# Altium PCB 2um_Homodyne.PcbDoc
Units mil, origin at the board's own origin, x right, y up, seen from the top; angles counter-clockwise.
Board outline 2534 x 1642.5 mil, 4 copper layers (Top Layer, GND, +Vs, Bottom Layer), stack 30.634 mil thick; 46 components, 33 nets, 161 pads, 118 vias.
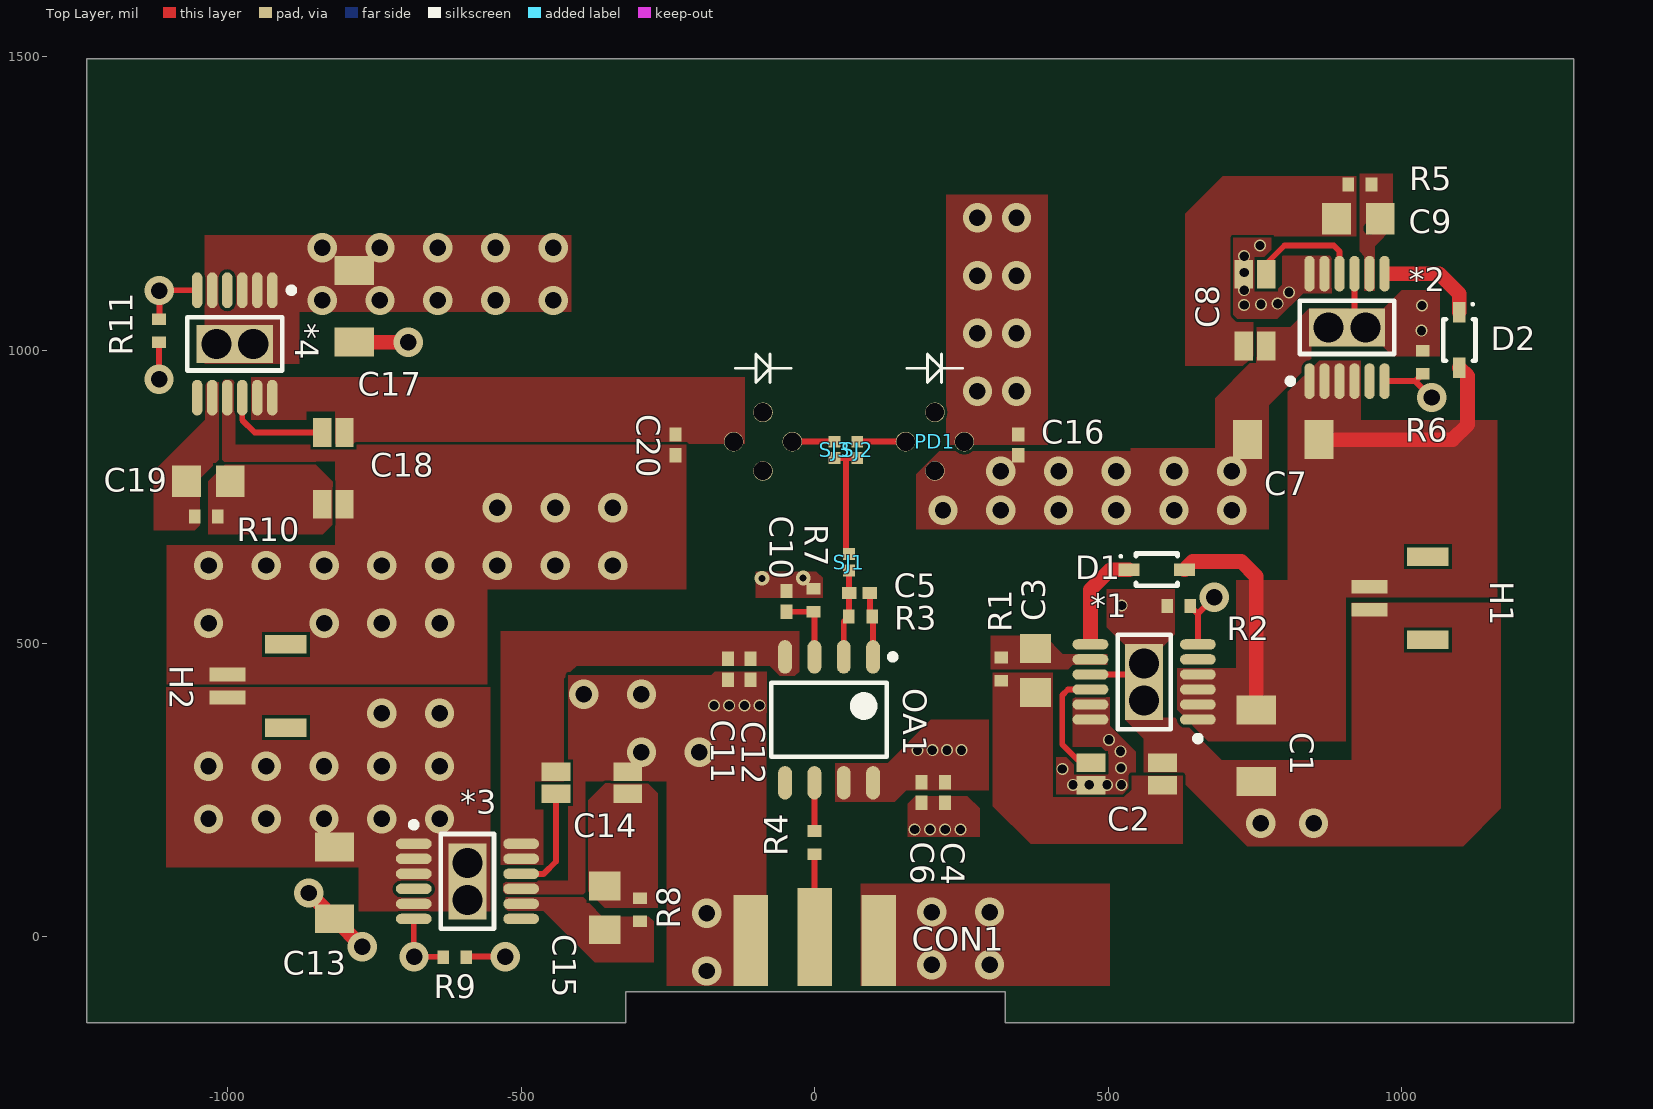
[diagram p0: Top Layer view]
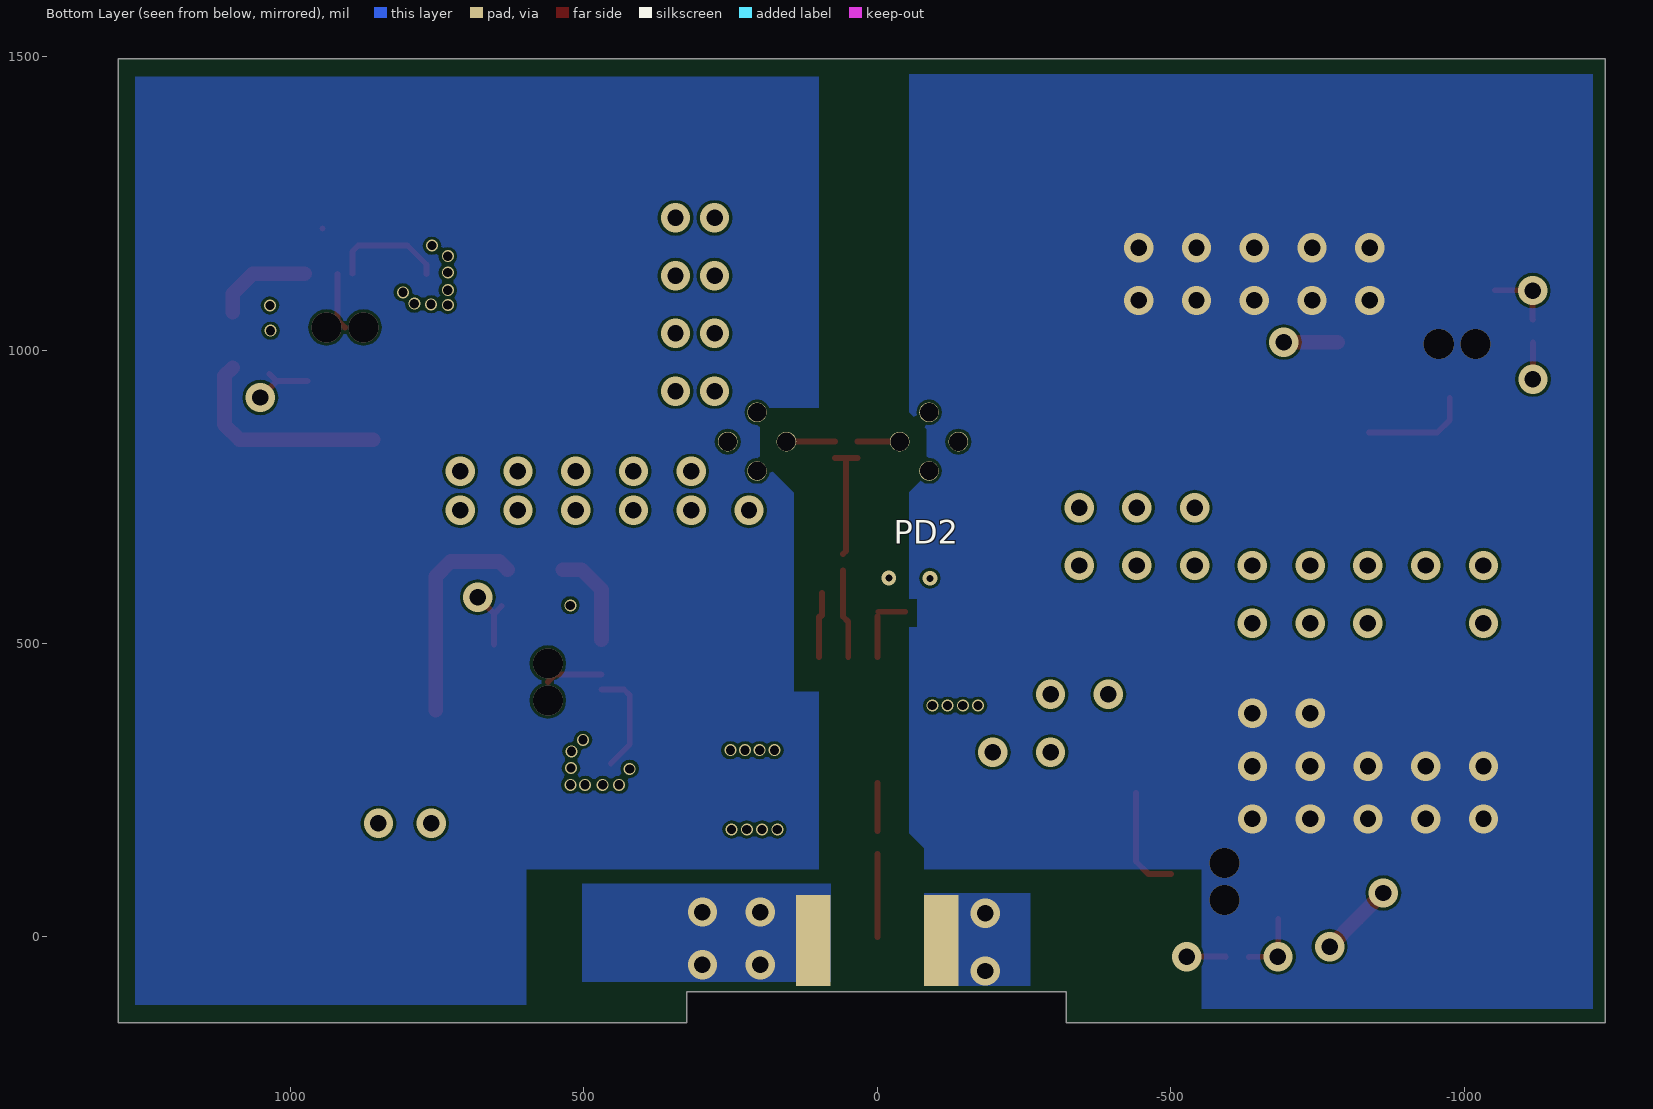
[diagram p1: Bottom Layer view, seen from below]
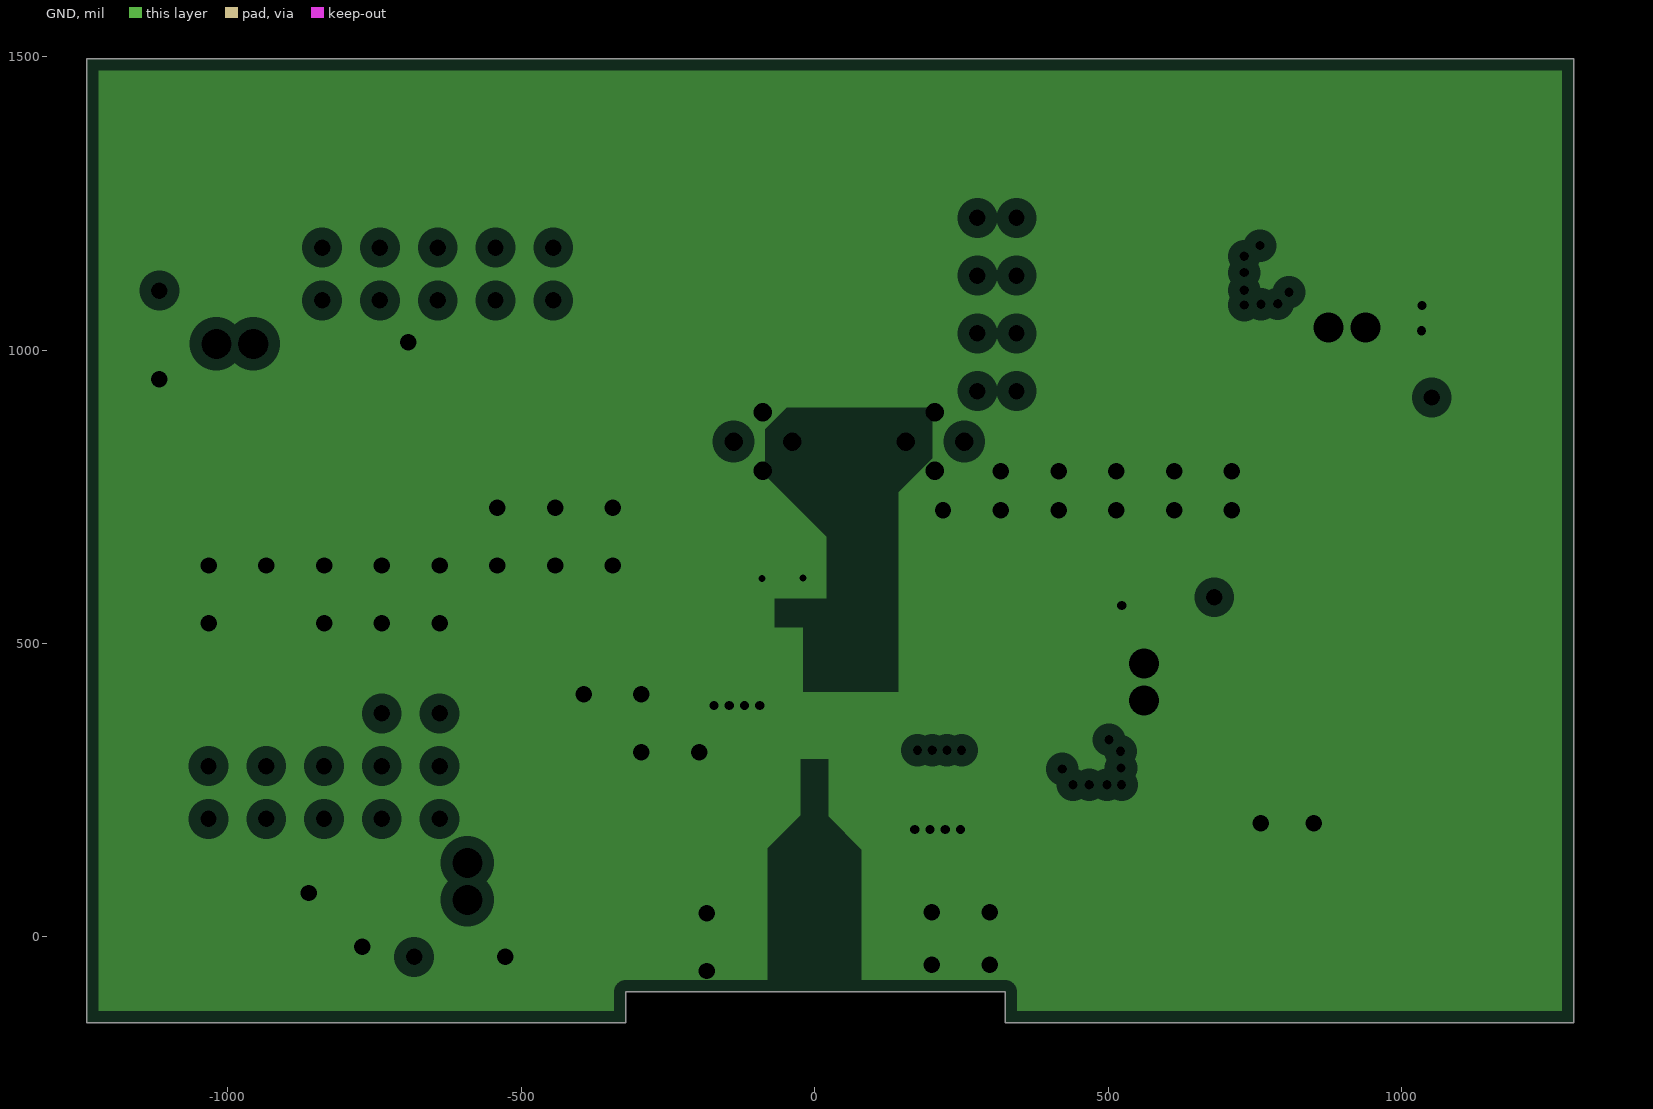
[diagram p2: GND, clearances drawn from the general rule]
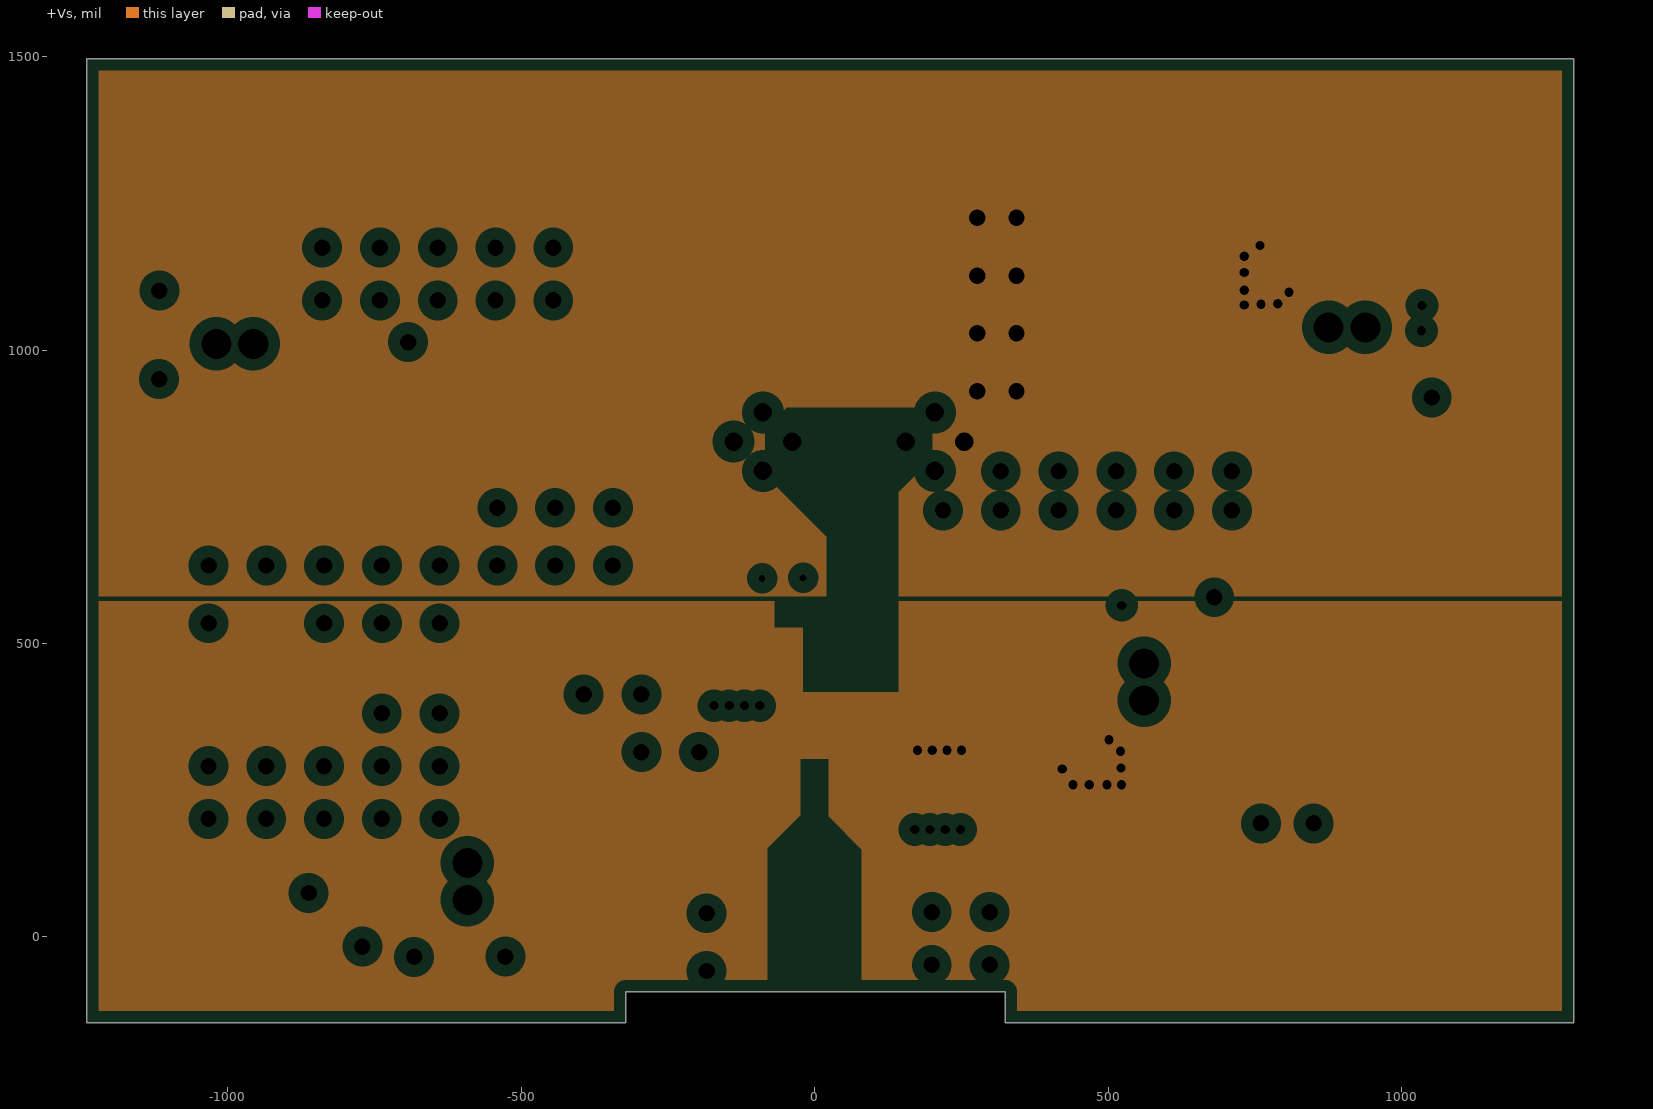
[diagram p3: +Vs, clearances drawn from the general rule]

## Layer stack, top to bottom
Top Solder: solder mask 0.4, Solder Resist, Dk 3.5
Top Layer: signal copper 1.4
Dielectric 1: core 10, FR-4, Dk 4.2
GND: plane copper 1.417, net GND
Dielectric 3: prepreg 5, Dk 4.2
+Vs: plane copper 1.417, net +Vs
Dielectric 2: core 10, Dk 4.2
Bottom Layer: signal copper 1.4
Bottom Solder: solder mask 0.4, Solder Resist, Dk 3.5

## Board outline
-1240.5,-146 -1240.5,1496.5 1293.5,1496.5 1293.5,-146 325,-146 325,-93 -321.5,-93 -321.5,-146

## Design rules (kind name [scope] priority, off if disabled: settings)
Clearance [All] p1: gap=5 ignorepadtopadclearanceinfootprint=FALSE except(0: Arc-Hole Track-Hole SMDPad-Hole THPad-Hole Via-Hole Fill-Hole Poly-Hole Region-Hole Text-Hole; 10: Arc-Text Track-Text SMDPad-Text THPad-Text Via-Text Fill-Text Poly-Text Region-Text Text-Text)
HoleSize [All] p1: absolutevalues=TRUE maxlimit=100 minlimit=0.79 maxpercent=80.000 minpercent=20.000
PlaneClearance [All] p1: clearance=20
PlaneConnect [All] p1: planeconnectstyle=Direct reliefexpansion=20 reliefentries=4 reliefconductorwidth=10 reliefairgap=10
PolygonConnect [All] p1: connectstyle=Direct reliefconductorwidth=10 reliefentries=4 polygonreliefangle="90 Angle" airgapwidth=10
RoutingVias [All] p1: holewidth=28 width=50 viastyle="Through Hole" minholewidth=7.87 minwidth=11.81 maxholewidth=236.22 maxwidth=50
SolderMaskExpansion [All] p1: expansion=4
Width [All] p1: maxlimit=300 minlimit=5 preferedwidth=10 minimp=50.000000 maximp=50.000000 favimp=50.000000
27 further rules are at their usual default settings.

## Components (designator, comment, footprint, x,y, rotation, side; value= is the part's Value field where it differs from the comment)
*1 "LT3045" LT3045/3094 561.5,434.5 r180 top
*2 "LT3045" LT3045/3094 907.15,1038.61 r90 top locked
*3 "LT3094" LT3045/3094 -591.5,94.73 r0 top
*4 "LT3094" LT3045/3094 -988,1010.43 r270 top
C1 "SMD CAP" 1206CAP 752.61,325.85 r90 top
C2 "KelvinCap" Kelvin1206 531.96,277.85 r0 top
C3 "SMD CAP" 0805CAP 376.29,453.85 r90 top
C4 "SMD CAP" 0402CAP 222.5,246.2 r270 top
C5 "SMD CAP" 0402CAP 76.5,586.25 r0 top
C6 "SMD CAP" 0402CAP 182.5,246.2 r270 top
C7 "SMD CAP" 1206CAP 798.5,847.5 r0 top
C8 "KelvinCap" Kelvin1206 750.5,1068.15 r270 top
C9 "SMD CAP" 0805CAP 926.5,1223.82 r0 top
C10 "SMD CAP" 0402CAP -47.5,571.88 r270 top
C11 "SMD CAP" 0402CAP -147.5,456.2 r270 top
C12 "SMD CAP" 0402CAP -108.84,456.2 r270 top
C13 "SMD CAP" 1206CAP -818,92 r90 top
C14 "KelvinCap" Kelvin1206 -379.5,262.73 r0 top
C15 "SMD CAP" 0805CAP -357.5,49.73 r270 top
C16 "SMD CAP" 0402CAP 347,838.5 r270 top
C17 "SMD CAP" 1206CAP -784.5,1074.5 r270 top
C18 "KelvinCap" Kelvin1206 -820,798.43 r270 top
C19 "SMD CAP" 0805CAP -1033,776.43 r180 top
C20 "SMD CAP" 0402CAP -237,838.5 r270 top
CON1 "132322_SMA_EDGE" SMA_EDGE 0,0 r270 top
D1 "1N4148 SMD Diode" "1N4148_SMD DIODE" 582.96,625.91 r0 top
D2 "1N4148 SMD Diode" "1N4148_SMD DIODE" 1098.56,1017.15 r270 top
H1 "T1M SAMTEC" Mini_Header 945.59,577.13 r270 top
H2 "T1M SAMTEC" Mini_Header -1000.41,427.63 r270 top
OA1 "ADA4817-1" ADA4817-SOP 24.66,369.94 r270 top
PD1 "PD_IG26X250S4i" IG26X250S4i 205,844 r0 top
PD2 "PD_IG26X250S4i" IG26X250S4i -88,844 r0 bottom
R1 "SMD_Resistor" SMD_RES_0402 317.99,476.22 r270 top
R2 "SMD_Resistor" SMD_RES_0402 600.96,563.67 r0 top
R3 "SMD_Resistor" SMD_RES_0402 58.5,546.2 r0 top
R4 "SMD_Resistor" SMD_RES_0402 -0.34,141.2 r90 top
R5 "SMD_Resistor" SMD_RES_0402 948.87,1282.12 r180 top
R6 "SMD_Resistor" SMD_RES_0402 1036.32,999.15 r270 top
R7 "SMD_Resistor" SMD_RES_0402 -2.06,593.53 r270 top
R8 "SMD_Resistor" SMD_RES_0402 -297.5,26.83 r90 top
R9 "SMD_Resistor" SMD_RES_0402 -593.5,-34.44 r180 top
R10 "SMD_Resistor" SMD_RES_0402 -1056.54,716.43 r0 top
R11 "SMD_Resistor" SMD_RES_0402 -1117.17,1013 r90 top
SJ1 "SJ_0402" Solder_Jumper 58.5,652.5 r270 top
SJ2 "SJ_0402" Solder_Jumper 72.5,844 r270 top
SJ3 "SJ_0402" Solder_Jumper 34,844 r270 top

## Footprints (in the part's own frame and the unit in brackets; to place one, negate y for a bottom-side part, rotate by r counter-clockwise, add the part's x,y. Pads: shape width x height; smd on the part's side, far side on the other; paste and mask are expansions set on the pad)
"1N4148_SMD DIODE" [mm] "Reverse protection diode"
  rect 0.9x0.55 smd: 1(-1.2,0) 2(1.2,0)
  silkscreen extent -1.6,-0.7 0.9,0.7, body extent -1.25,-0.67 1.25,0.67, height 1
0402CAP [mm] "0402 Package SMD Capacitor"
  rect 0.62x0.52 smd: 1(-0.45,0) 2(0.45,0)
  body extent -0.55,-0.3 0.55,0.3, height 0.6
0805CAP [mm] "0805 Package SMD Capacitor"
  rect 1.25x1.35 smd: 1(-0.95,0) 2(0.95,0)
  body extent -1.1,-0.72 1.1,0.72, height 1.45
1206CAP [mm] "1206 Package SMD Capacitor"
  rect 1.25x1.7 smd: 1(-1.55,0) 2(1.55,0)
  body extent -1.7,-0.9 1.7,0.9, height 1.1
ADA4817-SOP [mm] "SOP, 8-Leads, Body 4.90x3.90mm, Pitch 1.27mm, IPC Medium Density"
  oval 1.45x0.6 smd: 1(-2.725,1.905) 2(-2.725,0.635) 3(-2.725,-0.635) 4(-2.725,-1.905) 5(2.725,-1.905) 6(2.725,-0.635) 7(2.725,0.635) 8(2.725,1.905)
  silkscreen extent -2.85,-2.5 1.6,2.88, body extent -3,-2.5 3,2.5, height 1.75
IG26X250S4i [mm] "InGaAs"
  round 0.85 hole 0.8: 1(-1.27,0) 2(0,-1.27) 2(0,1.27) 3(1.27,0)
  body extent -2.68,-2.68 2.68,2.68, height 3.2
Kelvin1206 [mm]
  rect 1.25x0.8 smd: 1(-1.55,-0.483) 2(-1.55,0.483) 3(1.55,0.483) 4(1.55,-0.483)
  body extent -1.7,-0.9 1.7,0.9, height 1.1
LT3045/3094 [mm] "MSOP-12"
  oval 1.55x0.45 smd mask+0.051: 1(-2.325,1.625) 2(-2.325,0.975) 3(-2.325,0.325) 4(-2.325,-0.325) 5(-2.325,-0.975) 6(-2.325,-1.625) 7(2.325,-1.625) 8(2.325,-0.975) 9(2.325,-0.325) 10(2.325,0.325) 11(2.325,0.975) 12(2.325,1.625)
  rect 1.651x3.3 smd: 13(0,0)
  silkscreen extent -2.45,-2.05 1.15,2.57, body extent -2.45,-2.05 2.45,2.05, height 1.1
Mini_Header [mm]
  rect 0.6x1.55 smd: 1(-0.5,0) 2(0.5,0)
  rect 0.8x1.8 smd: ""(-1.8,2.525) ""(1.8,2.525)
  body extent -2.2,-0.39 2.2,4.56, height 5.48
SMA_EDGE [mm] "SMA RF Board Edge Connector"
  rect 4.25x1.5 smd: 1(0,0)
  rect 3.95x1.5 smd: 2(0.15,2.77) 2(0.15,-2.77)
  rect 3.95x1.5 smd far side: 2(0.15,2.77) 2(0.15,-2.77)
SMD_RES_0402 [mm] "0402 Package SMD Resistor"
  rect 0.5x0.6 smd: 1(0,0) 2(1,0)
  body extent -0.05,-0.3 1.05,0.3, height 0.6
Solder_Jumper [mil]
  rect 20x20 smd: 1(0,0) 2(28,0)

## Part data
C1 C2 C7 C8 C13 C14 C17 C18: Capacitance=10uF
C3 C6 C9 C11 C15 C19: Capacitance=470nF
C4 C12: Capacitance=1uF
C5: Feedback capacitance=Cf
C10: Capacitance=Cf
C16 C20: Capacitance=100nF
D1 D2: "RS: 761-3476"
H1 H2: library part Mini_Header
R1 R8: Resistance=53k
R2 R9 R11: Resistance=SHORT
R3: Feedback resistance=Rf
R5: Resistancce=13k
R6: Resistanace=SHORT
R7: Resistance=Rf
R10: Resistance=13k

## Via types
v1: diameter 50, hole 28, Top Layer to Bottom Layer, 77 vias
v2: diameter 20.47, hole 15.75, Top Layer to Bottom Layer, 31 vias
v3: diameter 51.18, hole 51.18, Top Layer to Bottom Layer, 8 vias
v4: diameter 25, hole 12, Top Layer to Bottom Layer, 2 vias

## Nets (pads, with @x,y where several pads share a name; then routed paths per layer and width w, separated by ;. In a path a pad name is that pad's centre, name@x,y a point inside that pad or via, vN(x,y) a via of type N, cw(c..) or ccw(c..) an arc to the next point about the centre after c; other vN are vias at no path point)
+Vb: *2.11 *2.12 C8.1 C16.1 PD1.3
  other v1: 277.5,930 344,930 277.5,1028.43 344,1028.43 277.5,1126.85 344,1126.85 277.5,1225.28 344,1225.28
  other v2: 732,1077 760.5,1078 789,1079 808.5,1098.5 732,1102 732,1132 732,1160 759,1178
+Vs: *1.11 *1.12 C2.1 C4.1 C6.1 OA1.7 OA1.8
  other v2: 440.11,259.35 468.11,259.35 498.11,259.35 523.11,259.35 422.11,286.35 522.11,287.85 521.11,316.35 175.5,318.2 200.5,318.2 225.5,318.2 250.5,318.2 501.61,335.85
-Vb: *4.11 *4.12 C18.2 C20.1 PD2.1
-VBAT: *3.1 *3.2 *3.3 *3.5 *3.13 *4.1 *4.2 *4.3 *4.5 *4.13 C13.2 C17.1 H2.2
  other v1: -1032.78,201.15 -934.35,201.15 -835.93,201.15 -737.5,201.15 -639.07,201.15 -1032.78,291.07 -934.35,291.07 -835.93,291.07 -737.5,291.07 -639.07,291.07 -737.5,381 -639.07,381 -839,1084.57 -740.57,1084.57 -642.15,1084.57 -543.72,1084.57 -445.3,1084.57 -839,1174.5 -740.57,1174.5 -642.15,1174.5 -543.72,1174.5 -445.3,1174.5
  other v3: -591.5,63.24 -591.5,126.23 -1019.5,1010.43 -956.5,1010.43
-Vs: *3.11 *3.12 C11.1 C12.1 C14.2 OA1.4
GND: *1.9 *1.13 *2.9 *2.13 *3.9 *4.9 C1.1 C2.3 C4.2 C6.2 C7.1 C8.3 C10.1 C11.2 C12.2 C13.1 C14.3 C16.2 C17.2 C18.3 C20.2 CON1.2 H1.2 H2.1 PD1.2 PD2.2 R2.1 R6.1 R7.1 R9.1 R11.1 | length 545.2
  Top Layer w10: R11.1 -1117,1013 v1(-1117,950.5) ; R9.1 -593.5,-33.5 v1(-527,-33.5) ; *1.9 548.7,447.3 *1.13 ; *2.13 919.95,1051.41 *2.9
  Top Layer w25: v1(-862,74.98) C13.1 v1(-770.5,-16.52) ; C17.2 v1(-692.5,1013.48)
  other v1: -184,-57.93 199.65,-47.5 298.07,-47.5 -184,40.5 199.65,42.43 298.07,42.43 760.27,193.5 850.2,193.5 -295.07,314.88 -196.65,314.88 -393.5,413.31 -295.07,413.31 -1032.63,534.57 -835.78,534.57 -737.35,534.57 -638.93,534.57 -1032.63,633 -934.2,633 -835.78,633 -737.35,633 -638.93,633 -540.5,633 -442.07,633 -343.65,633 218.8,727 317.22,727 415.65,727 514.07,727 612.5,727 710.93,727 -540.5,731.43 -442.07,731.43 -343.65,731.43 317.22,793.5 415.65,793.5 514.07,793.5 612.5,793.5 710.93,793.5
  other v2: 170.5,183.2 196.5,183.2 222.5,183.2 248.5,183.2 -171.5,394.2 -145.5,394.2 -119.5,394.2 -93.5,394.2 523.2,565 1034,1033 1035,1076
  other v3: 561.5,403.01 561.5,466 875.66,1038.61 938.65,1038.61
  other v4: -89.5,611.2 -19.5,611.7
Hs: SJ1.1 SJ2.2 SJ3.2 | length 204.2
  Top Layer w10: SJ3.2 53.25,816 ; SJ1.1 53.25,657.75 53.25,816 ; SJ2.2 53.25,816
ILIM: *1.6 R2.2 | length 109.9
  Top Layer w10: R2.2 653.04,550.97 ; *1.6 653.04,550.97 ; v1(680.92,578.85) 653.04,550.97
Net*1_7: *1.7 D1.1 | length 165.2
  Top Layer w25: *1.7@469.96,506.5 469.96,591.85 504.02,625.91 D1.1
Net*2_6: *2.6 R6.2 | length 109.9
  Top Layer w10: *2.6 1023.62,947.08 ; R6.2 1023.62,947.08 ; v1(1051.5,919.2) 1023.62,947.08
Net*2_7: *2.7 D2.1 | length 168.4
  Top Layer w25: *2.7@976,1130.15 1064.5,1130.15 1098.56,1096.09 D2.1
Net*2_8: *2.8 C9.2 R5.1 | length 0.1
  Top Layer w10: C9.2@945.5,1207.15 C9.2@945.54,1207.11
Net*3_6: *3.6 R9.2 | length 114.8
  Top Layer w10: v1@-683.04,-33.8 *3.6 ; v1(-682.5,-33.8) -632.87,-33.8 R9.2
Net*3_8: *3.8 C15.2 R8.1
Net*4_6: *4.6 R11.2 | length 114.2
  Top Layer w10: R11.2 -1116.54,1052.37 v1(-1116.54,1101.43) ; v1@-1116.54,1101.96 *4.6
Net*4_8: *4.8 C19.2 R10.1
NetC2_4: C2.4 C3.1 R1.2
NetC5_1: C5.1 OA1.2 R3.1 SJ1.2 | length 151.2
  Top Layer w10: OA1.2 49.66,537.35 R3.1 58.78,546.48 C5.1 58.5,586.54 SJ1.2
NetC5_2: C5.2 OA1.1 R3.2 | length 112.1
  Top Layer w10: C5.2 94.22,549.85 ccw(c97.87,549.85) R3.2 cw(c97.87,544.41) 99.66,544.41 OA1.1
NetC8_4: C8.4 C9.1 R5.2
NetC10_2: C10.2 OA1.3 R7.2 | length 114.1
  Top Layer w10: C10.2 R7.2 ; OA1.3 R7.2@-0.34,545.87
NetC14_4: C14.4 C15.1 R8.2
NetC18_4: C18.4 C19.1 R10.2
NetCON1_1: CON1.1 R4.1 | length 141.5
  Top Layer w10: R4.1 0,141.2 CON1.1
NetOA1_6: OA1.6 R4.2 | length 82.1
  Top Layer w10: R4.2 OA1.6
NetPD1_1: PD1.1 SJ2.1 | length 82.5
  Top Layer w10: SJ2.1 PD1.1
NetPD2_3: PD2.3 SJ3.1 | length 72
  Top Layer w10: PD2.3 SJ3.1
OUTS: *1.10 C2.2 | length 181.7
  Top Layer w10: C2.2@454.25,295.57 421.96,327.85 421.96,411.85 431.82,421.71 *1.10
OUTS1: *2.10 C8.2 | length 198.4
  Top Layer w10: C8.2@768.22,1129.17 768.22,1145.86 800.5,1178.15 884.5,1178.15 894.36,1168.29 *2.10
OUTS2: *3.10 C14.1 | length 184.5
  Top Layer w10: *3.10 -461.75,107.53 -440.52,128.76 C14.1@-440.52,245.02
OUTS3: *4.10 C18.1 | length 184.5
  Top Layer w10: *4.10 -975.2,880.68 -953.98,859.45 C18.1@-837.72,859.45
SET1: *1.8 C3.2 R1.1
VBAT: *1.1 *1.2 *1.3 *1.4 *2.1 *2.2 *2.3 *2.4 C1.2 C7.2 D1.2 D2.2 H1.1 | length 732.3
  Top Layer w25: D1.2 644.15,639.85 726.96,639.85 752.61,614.2 C1.2 ; C7.2 1086.85,847.5 1112.5,873.15 1112.5,955.96 D2.2
pads on no net: *1.5 *2.5 *3.4 *3.7 *4.4 *4.7 H1. H2. OA1.5

## Polygon pours and split planes (outlines as drawn)
GND on Top Layer "Top Layer-GND 3" (solid, pour order 255): 614,515.89 592.96,494.85 592.96,373.85 620.96,373.85 693.96,300.85 922,300.85 922,155 736.81,155 610.96,280.85 560.96,280.85 560.96,337.85 528.96,369.85 529.96,370.85 529.96,495.85 497.96,527.85 497.96,592.85 614,592.85
+Vs on Top Layer "Top Layer-+Vb" (solid, pour order 249): 442.83,276.85 442.83,292.13 429.11,305.85 408.61,305.85 408.61,240.85 539.96,240.85 546.96,247.85 546.96,315.85 502.96,359.85 502.96,408.85 439.61,408.85 439.61,324.35 488.46,324.35 500.96,311.85 500.96,276.85
-Vs on Top Layer "Top Layer--Vs" (solid, pour order 171): -427.5,440.2 -405.5,462.2 -169.5,462.2 -169.5,521.2 -534.5,521.2 -534.5,122.73 -462.5,122.73 -462.5,216.73 -476.5,216.73 -476.5,265.73 -427.5,265.73
-Vb on Top Layer "Top Layer--Vb" (solid, pour order 170): -960,953.43 -960,881.43 -866,881.43 -866,895.43 -817,895.43 -817,840.43 -119,840.43 -119,953.43
GND on Top Layer "Top Layer-GND" (solid, pour order 168): -82.5,265.73 -82.5,-83.5 -252,-83.5 -252,265.73 -390.5,265.73 -390.5,71.73 -530.5,71.73 -530.5,95.73 -419.5,95.73 -419.5,446.2 -82.5,446.2
GND on Top Layer "Top Layer-GND 1" (solid, pour order 167): -987,949.43 -987,838.43 -219,838.43 -219,592.43 -817,592.43 -817,809.43 -1011,809.43 -1011,949.43
NetC14_4 on Top Layer "Top Layer-NetC13_4" (solid, pour order 165): -385.5,77.73 -357.5,49.73 -267.5,49.73 -267.5,244.73 -284.5,261.73 -356.5,261.73 -385.5,232.73
NetC18_4 on Top Layer "Top Layer-NetC16_4" (solid, pour order 164): -1005,804.43 -1033,776.43 -1033,686.43 -838,686.43 -821,703.43 -821,775.43 -850,804.43
NetC2_4 on Top Layer "Top Layer-NetC2_4" (solid, pour order 157): 405.96,449.85 303.96,449.85 303.96,222.85 367.96,158.85 626.96,158.85 626.96,274.85 539.96,274.85 539.96,250.85 526.96,237.85 405.96,237.85
NetC8_4 on Top Layer "Top Layer-NetC8_4" (solid, pour order 156): 922.5,1194.15 922.5,1296.15 695.5,1296.15 631.5,1232.15 631.5,973.15 747.5,973.15 747.5,1060.15 723.5,1060.15 710.5,1073.15 710.5,1194.15
GND on Top Layer "Top Layer-GND 3" (solid, pour order 152): 985.5,989.15 967.5,1007.15 846.5,1007.15 846.5,979.15 773.5,906.15 773.5,695.15 682.5,695.15 682.5,918.15 753.5,989.15 753.5,1039.15 810.5,1039.15 842.5,1071.15 843.5,1070.15 968.5,1070.15 1000.5,1102.15 1065.5,1102.15 1065.5,989.15
+Vb on Top Layer "Top Layer-+Vb" (solid, pour order 150): 749.5,1157.28 764.78,1157.28 778.5,1171 778.5,1191.5 713.5,1191.5 713.5,1060.15 720.5,1053.15 788.5,1053.15 832.5,1097.15 881.5,1097.15 881.5,1160.5 797,1160.5 797,1111.65 784.5,1099.15 749.5,1099.15
GND on Top Layer "Top Layer-GND 4" (solid, pour order 243): 212.5,827.5 173.5,788.5 173.5,695.15 682.5,695.15 682.5,832.5 538.26,832.5 538.26,827.5
GND on Top Layer "Bottom Layer-GND" (solid, pour order 259): 78.5,91 78.5,-83 503,-83 503,91
GND on Top Layer "Top Layer-GND 2" (solid, pour order 247): -1104,431 -1104,667.5 -799.5,667.5 -799.5,596 -557.5,596 -557.5,431
GND on Top Layer "Top Layer-VBAT 1" (solid, pour order 245): 915.5,569.07 1045.5,569.07 1169.5,569.07 1169.5,218.93 1105.57,155 915.5,155
SET1 on Top Layer "Top Layer-No Net" (solid, pour order 155): 498.96,481.85 422.96,481.85 391.96,512.85 299.96,512.85 299.96,455.85 431.96,455.85 439.96,463.85 498.96,463.85
+Vb on Top Layer "Top Layer-+Vb 1" (solid, pour order 241): 224,838.5 397.5,838.5 397.5,1265 224,1265
-VBAT on Top Layer "Top Layer--VBAT" (solid, pour order 174): -552.5,43.73 -776.5,43.73 -776.5,118.73 -1105,118.73 -1105,425.5 -552.5,425.5
Net*3_8 on Top Layer "Top Layer-Net*3_8" (solid, pour order 162): -526.5,44.73 -462.5,44.73 -374.5,-43.27 -274.5,-43.27 -274.5,26.73 -282.5,34.73 -361.5,34.73 -394.5,67.73 -526.5,67.73
-VBAT on Top Layer "Top Layer--VBAT 1" (solid, pour order 173): -414.5,1195.43 -414.5,1065.5 -878,1065.5 -878,976.43 -1039,976.43 -1039,1195.43
Net*4_8 on Top Layer "Top Layer-Net*4_8" (solid, pour order 161): -1038,945.43 -1038,881.43 -1126,793.43 -1126,693.43 -1056,693.43 -1048,701.43 -1048,780.43 -1015,813.43 -1015,945.43
VBAT on Top Layer "Top Layer-VBAT" (solid, pour order 159): 718.7,457.85 718.7,607.5 904.97,607.5 904.97,457.85 904.96,333.85 670.96,333.85 617.96,386.85 617.96,457.85
GND on Top Layer "Top Signal-GND 6" (solid, pour order 237): 13.5,577.7 13.5,611.7 2.5,622.7 -100.5,622.7 -100.5,577.7
GND on Top Layer "Top Signal-GND 6" (solid, pour order 236): 13.5,577.7 13.5,611.7 2.5,622.7 -100.5,622.7 -100.5,577.7
GND on Top Layer "Top Signal-GND 6" (solid, pour order 235): 13.5,577.7 13.5,611.7 2.5,622.7 -100.5,622.7 -100.5,577.7
GND on Top Layer "Top Signal-GND 6" (solid, pour order 234): 13.5,577.7 13.5,611.7 2.5,622.7 -100.5,622.7 -100.5,577.7
GND on Top Layer "Top Signal-GND 6" (solid, pour order 233): 13.5,577.7 13.5,611.7 2.5,622.7 -100.5,622.7 -100.5,577.7
GND on Top Layer "Top Signal-GND 6" (solid, pour order 232): 13.5,577.7 13.5,611.7 2.5,622.7 -100.5,622.7 -100.5,577.7
GND on Top Layer "Top Signal-GND 6" (solid, pour order 231): 13.5,577.7 13.5,611.7 2.5,622.7 -100.5,622.7 -100.5,577.7
GND on Top Layer "Top Signal-GND 6" (solid, pour order 230): 13.5,577.7 13.5,611.7 2.5,622.7 -100.5,622.7 -100.5,577.7
GND on Top Layer "Top Signal-GND 6" (solid, pour order 229): 13.5,577.7 13.5,611.7 2.5,622.7 -100.5,622.7 -100.5,577.7
GND on Top Layer "Top Signal-GND 6" (solid, pour order 228): 13.5,577.7 13.5,611.7 2.5,622.7 -100.5,622.7 -100.5,577.7
GND on Top Layer "Top Signal-GND 6" (solid, pour order 227): 13.5,577.7 13.5,611.7 2.5,622.7 -100.5,622.7 -100.5,577.7
GND on Top Layer "Top Signal-GND 6" (solid, pour order 226): 13.5,577.7 13.5,611.7 2.5,622.7 -100.5,622.7 -100.5,577.7
GND on Top Layer "Top Signal-GND 6" (solid, pour order 225): 13.5,577.7 13.5,611.7 2.5,622.7 -100.5,622.7 -100.5,577.7
GND on Top Layer "Top Signal-GND 6" (solid, pour order 224): 13.5,577.7 13.5,611.7 2.5,622.7 -100.5,622.7 -100.5,577.7
GND on Top Layer "Top Signal-GND 6" (solid, pour order 223): 13.5,577.7 13.5,611.7 2.5,622.7 -100.5,622.7 -100.5,577.7
GND on Top Layer "Top Signal-GND 6" (solid, pour order 222): 13.5,577.7 13.5,611.7 2.5,622.7 -100.5,622.7 -100.5,577.7
GND on Top Layer "Top Signal-GND 6" (solid, pour order 221): 13.5,577.7 13.5,611.7 2.5,622.7 -100.5,622.7 -100.5,577.7
GND on Top Layer "Top Signal-GND 6" (solid, pour order 220): 13.5,577.7 13.5,611.7 2.5,622.7 -100.5,622.7 -100.5,577.7
GND on Top Layer "Top Signal-GND 6" (solid, pour order 219): 13.5,577.7 13.5,611.7 2.5,622.7 -100.5,622.7 -100.5,577.7
GND on Top Layer "Top Signal-GND 6" (solid, pour order 218): 13.5,577.7 13.5,611.7 2.5,622.7 -100.5,622.7 -100.5,577.7
GND on Top Layer "Top Signal-GND 6" (solid, pour order 217): 13.5,577.7 13.5,611.7 2.5,622.7 -100.5,622.7 -100.5,577.7
GND on Top Layer "Top Signal-GND 6" (solid, pour order 216): 13.5,577.7 13.5,611.7 2.5,622.7 -100.5,622.7 -100.5,577.7
GND on Top Layer "Top Signal-GND 6" (solid, pour order 215): 13.5,577.7 13.5,611.7 2.5,622.7 -100.5,622.7 -100.5,577.7
GND on Top Layer "Top Signal-GND 6" (solid, pour order 214): 13.5,577.7 13.5,611.7 2.5,622.7 -100.5,622.7 -100.5,577.7
GND on Top Layer "Top Signal-GND 6" (solid, pour order 213): 13.5,577.7 13.5,611.7 2.5,622.7 -100.5,622.7 -100.5,577.7
GND on Top Layer "Top Signal-GND 6" (solid, pour order 212): 13.5,577.7 13.5,611.7 2.5,622.7 -100.5,622.7 -100.5,577.7
GND on Top Layer "Top Signal-GND 6" (solid, pour order 211): 13.5,577.7 13.5,611.7 2.5,622.7 -100.5,622.7 -100.5,577.7
GND on Top Layer "Top Signal-GND 6" (solid, pour order 210): 13.5,577.7 13.5,611.7 2.5,622.7 -100.5,622.7 -100.5,577.7
GND on Top Layer "Top Signal-GND 6" (solid, pour order 209): 13.5,577.7 13.5,611.7 2.5,622.7 -100.5,622.7 -100.5,577.7
GND on Top Layer "Top Signal-GND 6" (solid, pour order 208): 13.5,577.7 13.5,611.7 2.5,622.7 -100.5,622.7 -100.5,577.7
GND on Top Layer "Top Signal-GND 6" (solid, pour order 207): 13.5,577.7 13.5,611.7 2.5,622.7 -100.5,622.7 -100.5,577.7
GND on Top Layer "Top Signal-GND 6" (solid, pour order 206): 13.5,577.7 13.5,611.7 2.5,622.7 -100.5,622.7 -100.5,577.7
GND on Top Layer "Top Signal-GND 6" (solid, pour order 205): 13.5,577.7 13.5,611.7 2.5,622.7 -100.5,622.7 -100.5,577.7
GND on Top Layer "Top Signal-GND 6" (solid, pour order 204): 13.5,577.7 13.5,611.7 2.5,622.7 -100.5,622.7 -100.5,577.7
GND on Top Layer "Top Signal-GND 6" (solid, pour order 203): 13.5,577.7 13.5,611.7 2.5,622.7 -100.5,622.7 -100.5,577.7
GND on Top Layer "Top Signal-GND 6" (solid, pour order 202): 13.5,577.7 13.5,611.7 2.5,622.7 -100.5,622.7 -100.5,577.7
GND on Top Layer "Top Signal-GND 6" (solid, pour order 201): 13.5,577.7 13.5,611.7 2.5,622.7 -100.5,622.7 -100.5,577.7
GND on Top Layer "Top Signal-GND 6" (solid, pour order 200): 13.5,577.7 13.5,611.7 2.5,622.7 -100.5,622.7 -100.5,577.7
GND on Top Layer "Top Signal-GND 6" (solid, pour order 199): 13.5,577.7 13.5,611.7 2.5,622.7 -100.5,622.7 -100.5,577.7
GND on Top Layer "Top Signal-GND 6" (solid, pour order 198): 13.5,577.7 13.5,611.7 2.5,622.7 -100.5,622.7 -100.5,577.7
GND on Top Layer "Top Signal-GND 6" (solid, pour order 197): 13.5,577.7 13.5,611.7 2.5,622.7 -100.5,622.7 -100.5,577.7
GND on Top Layer "Top Signal-GND 6" (solid, pour order 196): 13.5,577.7 13.5,611.7 2.5,622.7 -100.5,622.7 -100.5,577.7
GND on Top Layer "Top Signal-GND 6" (solid, pour order 195): 13.5,577.7 13.5,611.7 2.5,622.7 -100.5,622.7 -100.5,577.7
GND on Top Layer "Top Signal-GND 6" (solid, pour order 194): 13.5,577.7 13.5,611.7 2.5,622.7 -100.5,622.7 -100.5,577.7
GND on Top Layer "Top Signal-GND 6" (solid, pour order 193): 13.5,577.7 13.5,611.7 2.5,622.7 -100.5,622.7 -100.5,577.7
GND on Top Layer "Top Signal-GND 6" (solid, pour order 192): 13.5,577.7 13.5,611.7 2.5,622.7 -100.5,622.7 -100.5,577.7
GND on Top Layer "Top Signal-GND 6" (solid, pour order 191): 13.5,577.7 13.5,611.7 2.5,622.7 -100.5,622.7 -100.5,577.7
GND on Top Layer "Top Signal-GND 6" (solid, pour order 190): 13.5,577.7 13.5,611.7 2.5,622.7 -100.5,622.7 -100.5,577.7
GND on Top Layer "Top Signal-GND 6" (solid, pour order 189): 13.5,577.7 13.5,611.7 2.5,622.7 -100.5,622.7 -100.5,577.7
GND on Top Layer "Top Signal-GND 6" (solid, pour order 188): 13.5,577.7 13.5,611.7 2.5,622.7 -100.5,622.7 -100.5,577.7
GND on Top Layer "Top Signal-GND 6" (solid, pour order 187): 13.5,577.7 13.5,611.7 2.5,622.7 -100.5,622.7 -100.5,577.7
GND on Top Layer "Top Signal-GND 6" (solid, pour order 186): 13.5,577.7 13.5,611.7 2.5,622.7 -100.5,622.7 -100.5,577.7
GND on Top Layer "Top Signal-GND 6" (solid, pour order 185): 13.5,577.7 13.5,611.7 2.5,622.7 -100.5,622.7 -100.5,577.7
GND on Top Layer "Top Signal-GND 6" (solid, pour order 184): 13.5,577.7 13.5,611.7 2.5,622.7 -100.5,622.7 -100.5,577.7
GND on Top Layer "Top Signal-GND 6" (solid, pour order 183): 13.5,577.7 13.5,611.7 2.5,622.7 -100.5,622.7 -100.5,577.7
GND on Top Layer "Top Signal-GND 6" (solid, pour order 182): 13.5,577.7 13.5,611.7 2.5,622.7 -100.5,622.7 -100.5,577.7
GND on Top Layer "Top Signal-GND 6" (solid, pour order 181): 13.5,577.7 13.5,611.7 2.5,622.7 -100.5,622.7 -100.5,577.7
GND on Top Layer "Top Signal-GND 6" (solid, pour order 180): 13.5,577.7 13.5,611.7 2.5,622.7 -100.5,622.7 -100.5,577.7
GND on Top Layer "Top Signal-GND 6" (solid, pour order 179): 13.5,577.7 13.5,611.7 2.5,622.7 -100.5,622.7 -100.5,577.7
GND on Top Layer "Top Signal-GND 6" (solid, pour order 178): 13.5,577.7 13.5,611.7 2.5,622.7 -100.5,622.7 -100.5,577.7
GND on Top Layer "Top Signal-GND 6" (solid, pour order 177): 13.5,577.7 13.5,611.7 2.5,622.7 -100.5,622.7 -100.5,577.7
GND on Top Layer "Top Signal-GND 6" (solid, pour order 176): 13.5,577.7 13.5,611.7 2.5,622.7 -100.5,622.7 -100.5,577.7
GND on Top Layer "Top Signal-GND 6" (solid, pour order 175): 13.5,577.7 13.5,611.7 2.5,622.7 -100.5,622.7 -100.5,577.7
GND on Top Layer "Top Signal-GND 6" (solid, pour order 172): 13.5,577.7 13.5,611.7 2.5,622.7 -100.5,622.7 -100.5,577.7
-Vs on Top Layer "Top Signal--5 4" (solid, pour order 169): -76.5,462.2 -59.5,445.2 -33.5,445.2 -26.5,452.2 -26.5,521.2 -169.5,521.2 -169.5,462.2
GND on Top Layer "Top Signal-GND 10" (solid, pour order 166): 158.5,227.2 171.5,240.2 260.5,240.2 281.5,219.2 281.5,171.2 158.5,171.2
GND on Top Layer "Top Signal-GND 3" (solid, pour order 163): -81.5,452.2 -170.5,452.2 -183.5,439.2 -183.5,382.2 -81.5,382.2
+Vs on Top Layer "Top Signal-+5 2" (solid, pour order 160): 35.5,296.2 35.5,230.2 136.5,230.2 156.5,250.2 297,250.2 297,370 198.3,370 124.5,296.2
VBAT on Top Layer "Top Layer-VBAT 1" (solid, pour order 158): 930.5,880.5 1163,880.5 1163,579 930.5,579 806.5,579 806.5,929.15 859.5,982.15 930.5,982.15
Net*2_8 on Top Layer "Top Layer-SET1" (solid, pour order 154): 954.5,1101.15 954.5,1177.15 985.5,1208.15 985.5,1300.15 928.5,1300.15 928.5,1168.15 936.5,1160.15 936.5,1101.15
-VBAT on Bottom Layer "Bottom Layer-VBAT" (solid, pour order 238): -54.5,115 -552.5,115 -552.5,-122.5 -1219,-122.5 -1219,1470 -54.5,1470
no net on Bottom Layer "Bottom Layer-VBAT" (solid, pour order 257): 100,115 598,115 598,-115.5 1264.5,-115.5 1264.5,1466 100,1466
GND on Bottom Layer "Bottom Layer-GND" (solid, pour order 261): -260.5,74.5 -260.5,-83.5 -78,-83.5 -78,74.5
GND on Bottom Layer "Bottom Layer-GND" (solid, pour order 251): 78.5,91 78.5,-76 503,-76 503,91
GND on GND (split plane): 1273.4,-125.9 345.1,-125.9 345.1,-93 344.71,-89.08 343.57,-85.31 341.71,-81.83 339.21,-78.79 336.17,-76.29 332.69,-74.43 328.92,-73.29 325,-72.9 79.5,-72.9 79.5,149 23,205.5 23,302.5 -24,302.5 -24,207 -79.5,151.5 -79.5,-72.9 -321.5,-72.9 -325.42,-73.29 -329.19,-74.43 -332.67,-76.29 -335.71,-78.79 -338.21,-81.83 -340.07,-85.31 -341.21,-89.08 -341.6,-93 -341.6,-125.9 -1220.4,-125.9 -1220.4,1476.4 1273.4,1476.4
+Vb on +Vs (split plane): 1273.4,580.28 142.5,580.27 142.5,758 200.5,816 200.5,901.5 -47.5,901.5 -84,865 -84,787 21,682 21,580.27 -1220.4,580.27 -1220.4,1476.4 1273.4,1476.4
+Vs on +Vs (split plane): 1273.4,-125.9 345.1,-125.9 345.1,-93 344.71,-89.08 343.57,-85.31 341.71,-81.83 339.21,-78.79 336.17,-76.29 332.69,-74.43 328.92,-73.29 325,-72.9 79.5,-72.9 79.5,149 23,205.5 23,302.5 -24,302.5 -24,207 -79.5,151.5 -79.5,-72.9 -321.5,-72.9 -325.42,-73.29 -329.19,-74.43 -332.67,-76.29 -335.71,-78.79 -338.21,-81.83 -340.07,-85.31 -341.21,-89.08 -341.6,-93 -341.6,-125.9 -1220.4,-125.9 -1220.4,572.12 -67.5,572.12 -67.5,528 -19,528 -19,417.5 142.5,417.5 142.5,572.12 1273.4,572.12

## Other copper
Bottom Layer:
  pour cut-out: 21,576 -67.5,576 -67.5,528 -19,528 -19,417.5 142.5,417.5 142.5,757 200.5,815 200.5,901.5 -47.5,901.5 -84,865 -84,787 21,682
  pour cut-out: -79.5,-195.5 79.5,-195.5 79.5,149 23,205.5 23,302.5 -24,302.5 -24,207 -79.5,151.5
GND (plane layer: these items are gaps in the copper):
  pour cut-out: 21,576 -67.5,576 -67.5,528 -19,528 -19,417.5 142.5,417.5 142.5,757.5 200.5,815.5 200.5,901.5 -47.5,901.5 -84,865 -84,787 21,682
  pour cut-out: -79.5,-195.5 79.5,-195.5 79.5,149 23,205.5 23,302.5 -24,302.5 -24,207 -79.5,151.5
+Vs (plane layer: these items are gaps in the copper):
  pour cut-out: 21,576 -67.5,576 -67.5,528 -19,528 -19,417.5 142.5,417.5 142.5,758 200.5,816 200.5,901.5 -47.5,901.5 -84,865 -84,787 21,682
  pour cut-out: -79.5,-195.5 79.5,-195.5 79.5,149 23,205.5 23,302.5 -24,302.5 -24,207 -79.5,151.5
  lines w8: -1250.5,576.2 1357.5,576.2

## Silkscreen, mask and mechanical layers (free items; w line width, h text height)
Top Overlay:
  lines w5: -135,969 -100,969 ; -76,945 -76,969 ; -76,993 -76,969 ; -40,969 -75,969 -76,969 ; 157,969 192,969 ; 216,945 216,969 ; 216,993 216,969 ; 252,969 217,969 216,969 ; -100,969 -100,945 -76,969 ; -100,969 -100,993 -76,969 ; 192,969 192,993 216,969 ; 192,969 192,945 216,969
Bottom Overlay:
Mechanical 13:
  lines w3.5: -1240.5,-146 -321.5,-146 -321.5,-93 -79.5,-93 325,-93 325,-146 1293.5,-146 1293.5,1496.5 -1240.5,1496.5 -1240.5,-146